# Altium PCB UDEMY_PCB.PcbDoc
Units mm, origin at the board's own origin, x right, y up, seen from the top; angles counter-clockwise.
Board outline 50 x 57.25 mm, 2 copper layers (Top Layer, Bottom Layer); 38 components, 25 nets, 187 pads, 130 vias.
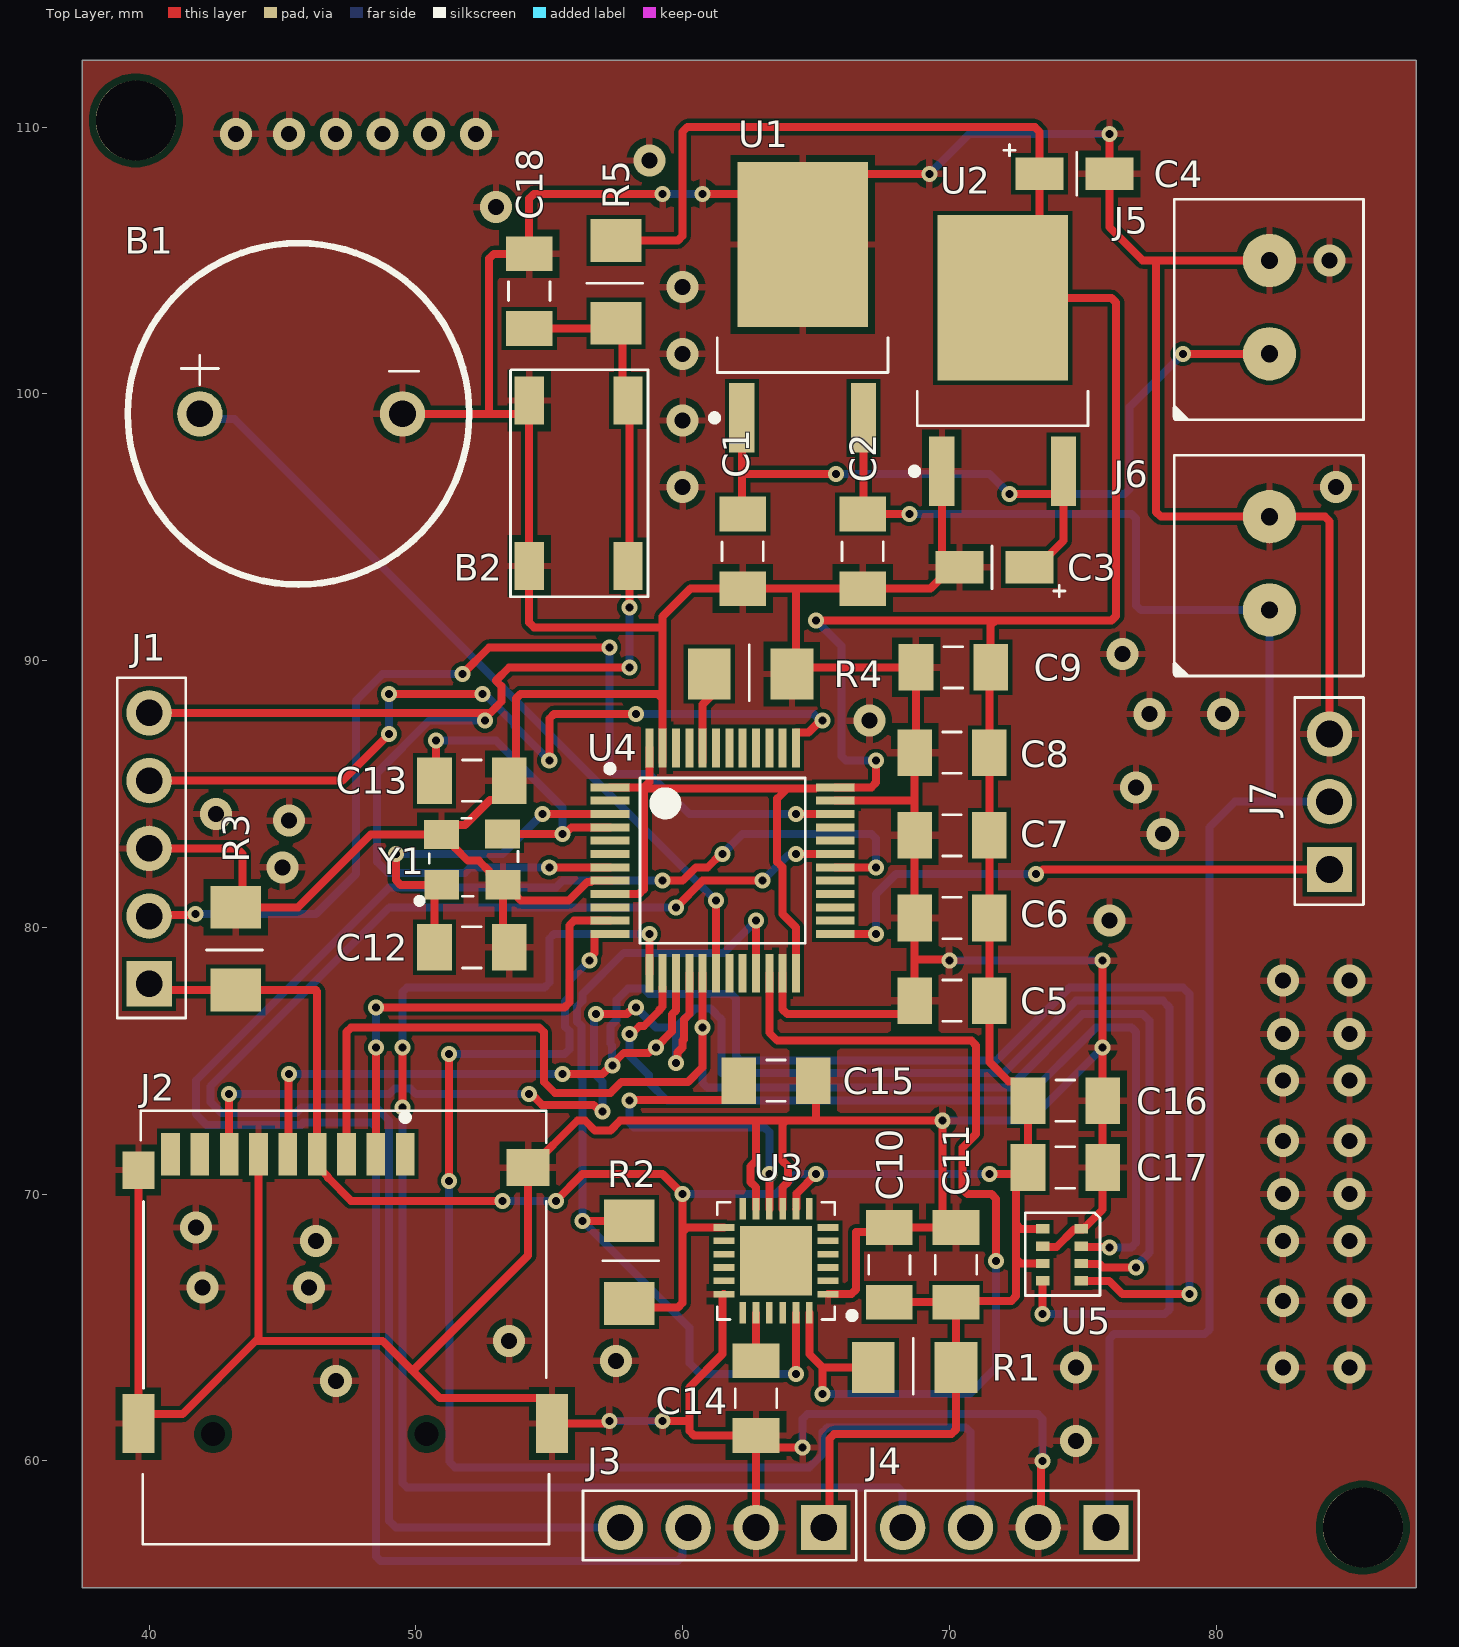
[diagram p0: Top Layer view]
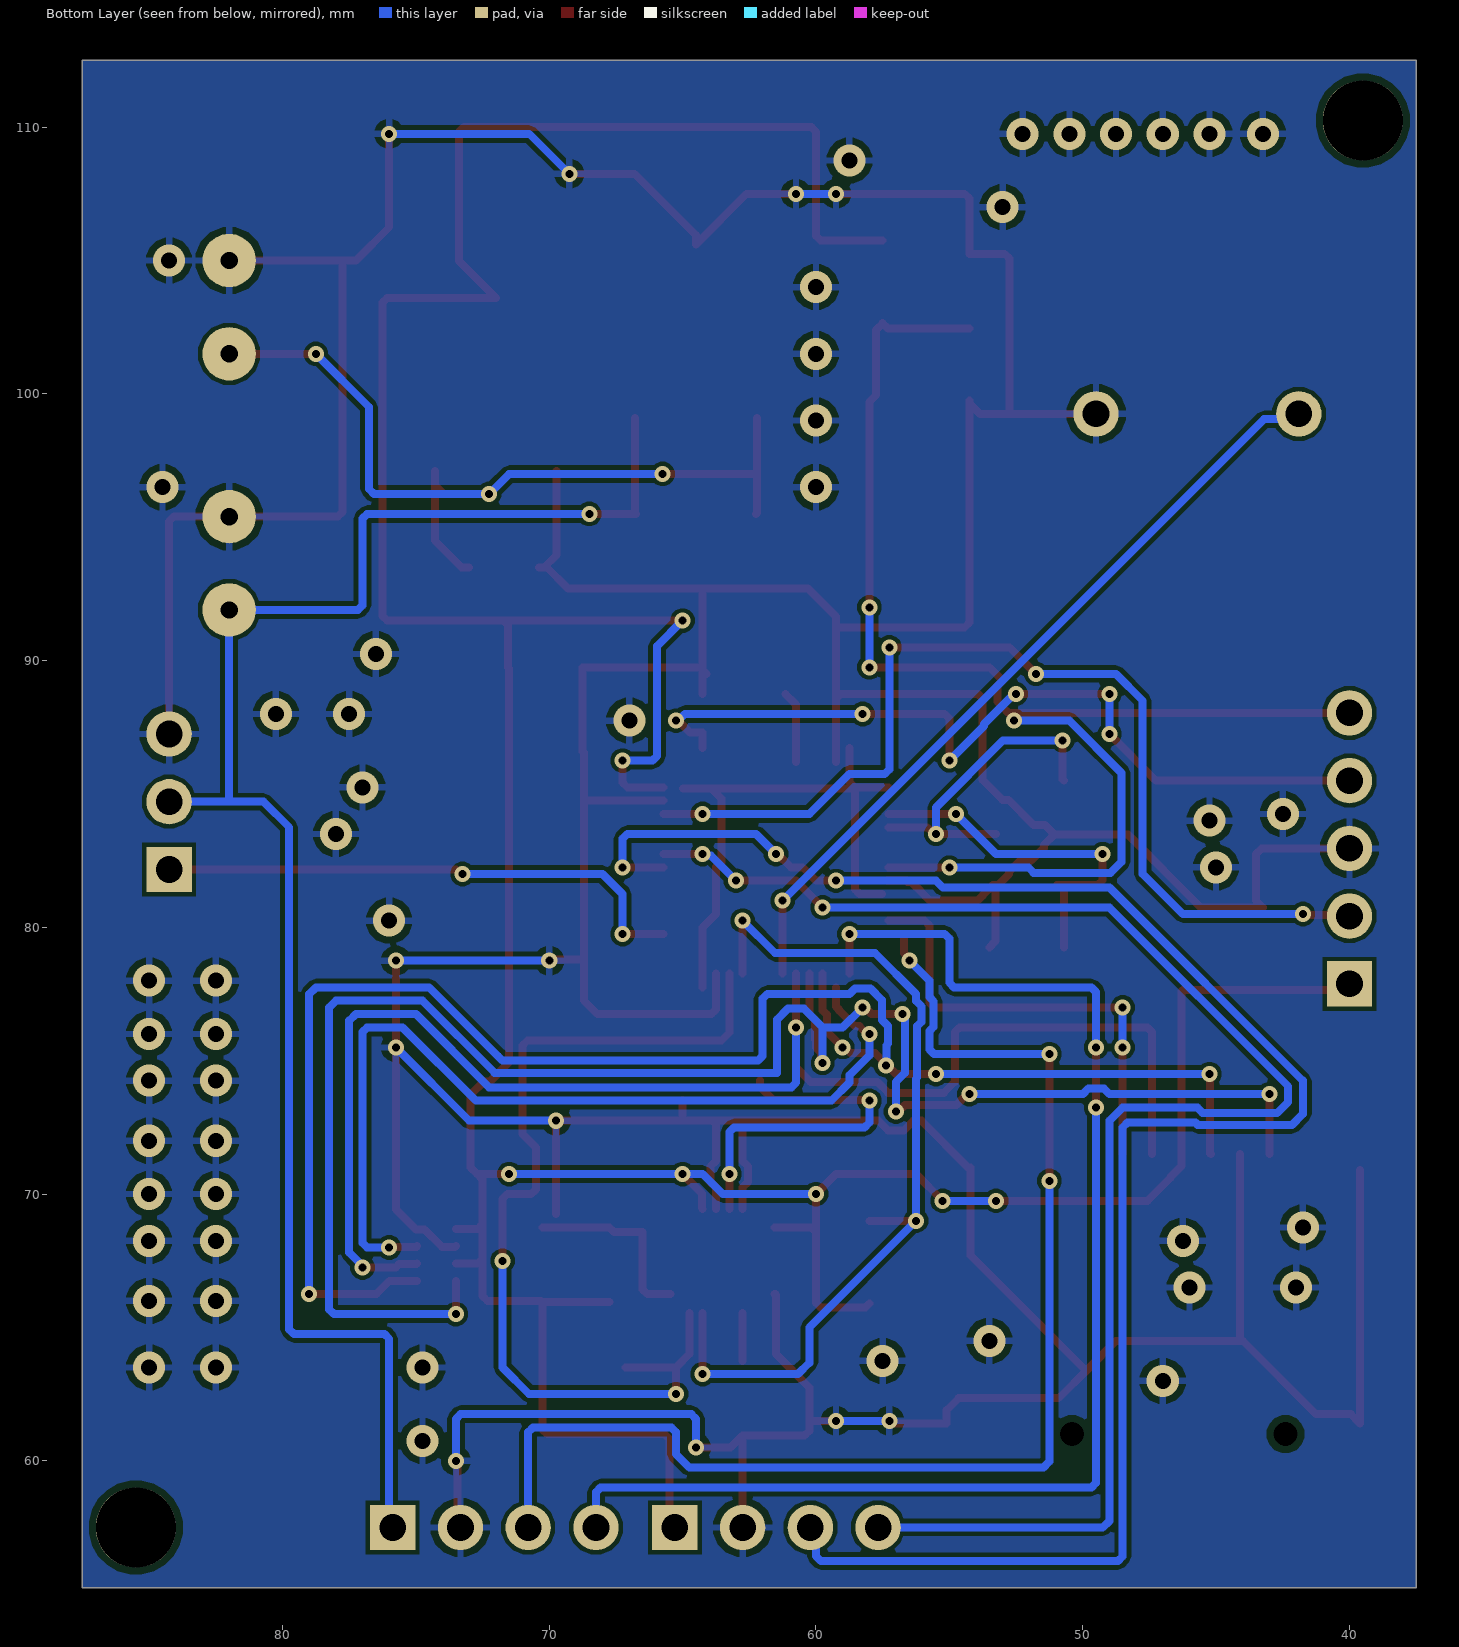
[diagram p1: Bottom Layer view, seen from below]
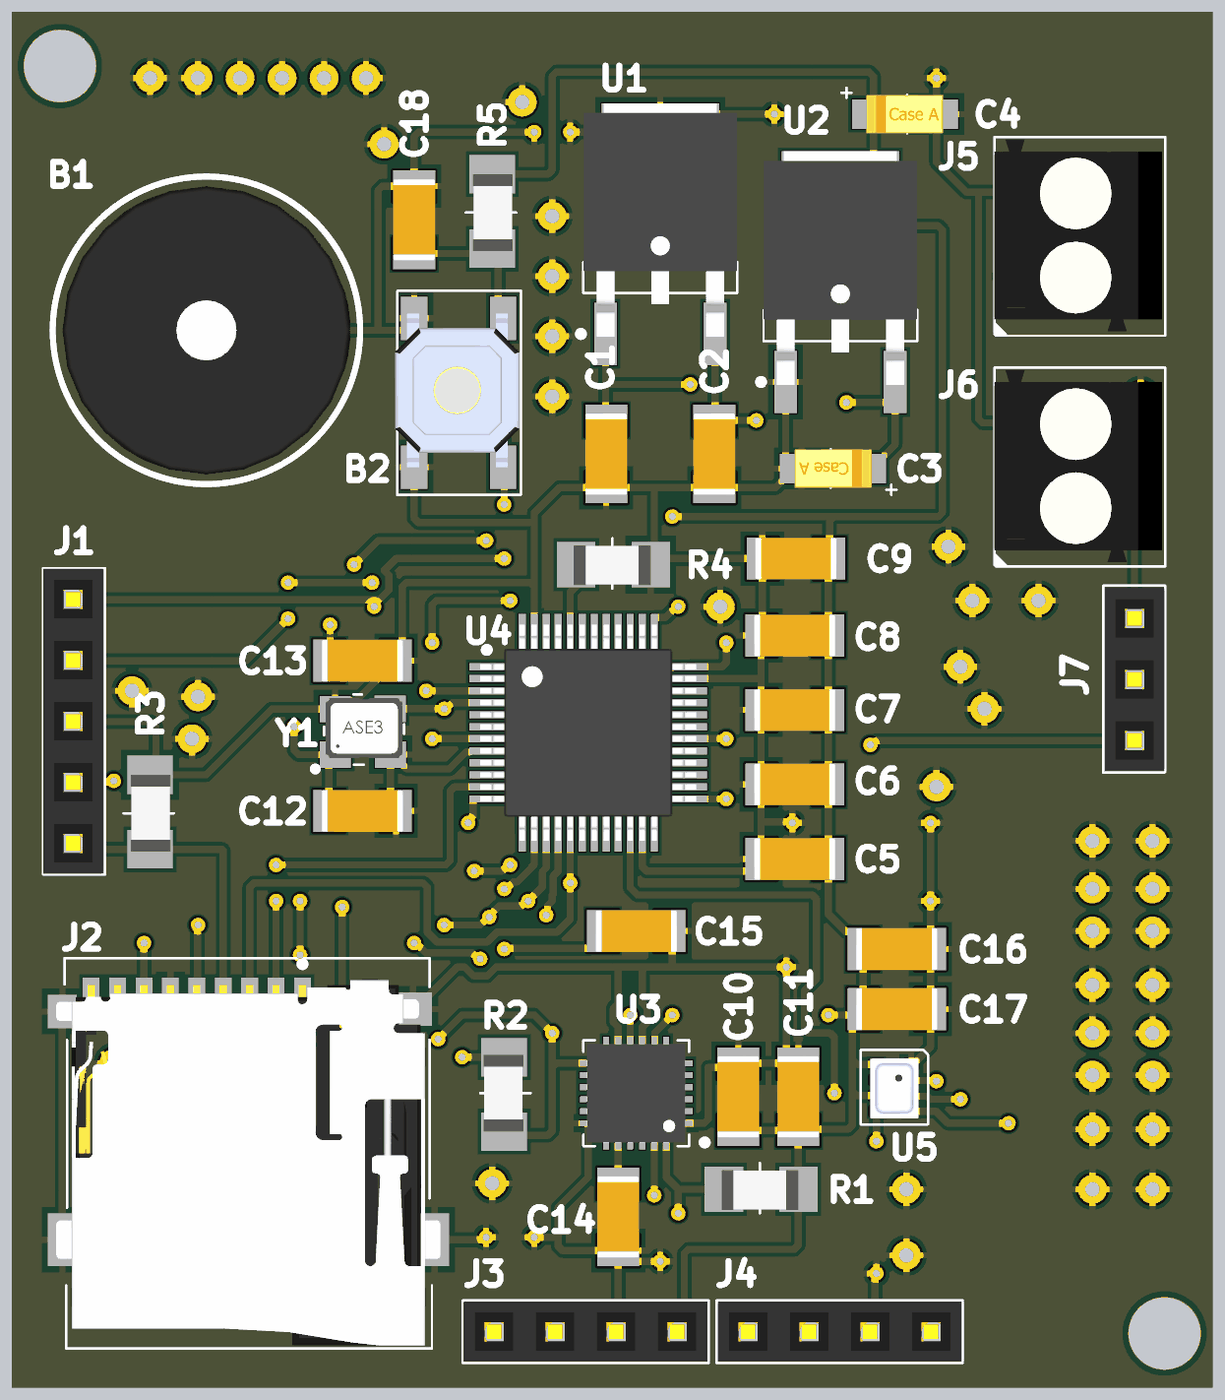
[diagram p2: 3D render of the assembled board from above, using the file's embedded part models]

## Layer stack, top to bottom
Top Solder: solder mask 0.0102, Solder Resist, Dk 3.5
Top Layer: signal copper 0.0356
Dielectric 1: dielectric 0.32, FR-4, Dk 4.8
Bottom Layer: signal copper 0.0356
Bottom Solder: solder mask 0.0102, Solder Resist, Dk 3.5

## Board outline
37.5,55.25 87.5,55.25 87.5,112.5 37.5,112.5

## Design rules (kind name [scope] priority, off if disabled: settings)
Clearance [All] p1: gap=0.254 ignorepadtopadclearanceinfootprint=FALSE except(0.152: Arc-Track Arc-SMDPad Arc-Poly Track-Track Track-SMDPad Track-Poly SMDPad-SMDPad SMDPad-Poly THPad-Poly Via-Poly Fill-Poly Poly-Poly)
HoleSize [All] p1: absolutevalues=TRUE maxlimit=3.1 minlimit=0.025 maxpercent=80.000 minpercent=20.000
MinimumSolderMaskSliver [All] p1: minsoldermaskwidth=0.096
PolygonConnect [All] p1: connectstyle=Relief reliefconductorwidth=0.254 reliefentries=4 polygonreliefangle="90 Angle" airgapwidth=0.254
RoutingVias [All] p1: holewidth=0.6 width=0.6 viastyle="Through Hole" minholewidth=0.3 minwidth=0.3 maxholewidth=0.9 maxwidth=1.27
SilkToSolderMaskClearance [IsPad] p1: minsilkscreentomaskgap=0.1 clearancetoexposedcopper=TRUE
SolderMaskExpansion [All] p1: expansion=0.102 istentingtop=FALSE
Width [All] p1: maxlimit=1 minlimit=0.254 preferedwidth=0.3 minimp=50.000000 maximp=50.000000 favimp=50.000000
27 further rules are at their usual default settings.

## Components (designator, comment, footprint, x,y, rotation, side; value= is the part's Value field where it differs from the comment)
B1 "BUZZER 5V" "BUZZER 5V" 41.9,99.25 r0 top
B2 "Push Button" "PUSB BUTTON-SMD" 57.95,99.75 r270 top
C1 "330nF Capasitor" "CAP 1206" 62.25,94.1 r90 top
C2 "0.1uF Capasitor" "CAP 1206" 66.75,94.1 r90 top
C3 "10 uF - Tantal" "C1206- TANTAL" 71.6,93.5 r180 top
C4 "10 uF - Tantal" "C1206- TANTAL" 74.78,108.25 r0 top
C5 "0.1uF" "CAP 1206" 70.1,77.25 r180 top
C6 "0.1uF" "CAP 1206" 70.1,80.35 r180 top
C7 "0.1uF" "CAP 1206" 70.1,83.45 r180 top
C8 "0.1uF" "CAP 1206" 70.1,86.55 r180 top
C9 "0.1uF" "CAP 1206" 70.15,89.75 r180 top
C10 "0.1uF" "CAP 1206" 67.75,67.35 r90 top
C11 "0.1uF" "CAP 1206" 70.25,67.35 r90 top
C12 "16 pF" "CAP 1206" 52.1,79.25 r0 top
C13 "16 pF" "CAP 1206" 52.1,85.5 r0 top
C14 "2.2 nF" "CAP 1206" 62.75,62.35 r270 top
C15 "0.1uF" "CAP 1206" 63.5,74.25 r0 top
C16 "0.1uF" "CAP 1206" 74.35,73.5 r0 top
C17 "0.1uF" "CAP 1206" 74.35,71 r0 top
C18 "0.1uF" "CAP 1206" 54.25,103.85 r90 top
J1 "Header 2.54 1x5" "Header 2.54 1x5" 40,77.88 r90 top
J2 "Micro SD Card Holder" "Micro SD Card Holder" 46.916,64.425 r0 top
J3 "Header 2.54 1x4" "Header 2.54 1x4" 64.79,56.775 r180 top
J4 "Header 2.54 1x4" "Header 2.54 1x4" 75.37,56.775 r180 top
J5 "Klemens 1x2 3.5mm" "Klemens 1x2 - 3.5mm" 81.95,103.1 r90 top
J6 "Klemens 1x2 3.5mm" "Klemens 1x2 - 3.5mm" 81.95,93.5 r90 top
J7 "Header 2.54 1x3" "Header 2.54 1x3" 84.225,82.17 r90 top
R1 "10K" "1206 RES" 67.15,63.5 r0 top
R2 "10K" "1206 RES" 58,69 r270 top
R3 "10K" "1206 RES" 43.25,77.65 r90 top
R4 "10K 1206" "1206 RES" 61,89.5 r0 top
R5 "10K 1206" "1206 RES" 57.5,102.65 r90 top
U1 "L7805" DPAK228P972X230-3N 64.5,103.25 r90 top
U2 "LD108633" DPAK228P972X230-3N 72,101.25 r90 top
U3 "MPU6050" QFN50P400X400X90_HS-25N 63.5,67.5 r180 top
U4 "STM32F101" LQFP48-STM 61.5,82.5 r0 top
U5 "BMP280" BMP280 74.95,68.7 r0 top
Y1 "8 MHz 12.5 pf Osc" "8 MHZ Osc." 51.947,82.083 r0 top

## Footprints (in the part's own frame and the unit in brackets; to place one, negate y for a bottom-side part, rotate by r counter-clockwise, add the part's x,y. Pads: shape width x height; smd on the part's side, far side on the other; paste and mask are expansions set on the pad)
"8 MHZ Osc." [mm]
  rect 1.3x1.1 smd mask+0.05: 1(-0.981,-0.49) 2(1.319,-0.49) 3(1.303,1.417) 4(-0.986,1.401)
  silkscreen extent -1.91,-1.19 1.88,2.01, body extent -1.38,-0.64 1.82,1.86, height 1.22
"1206 RES" [mm]
  rect 1.6x1.9 smd mask+0: 1(0,0) 1(0,0) 2(3.1,0)
  silkscreen extent 1.5,-1 1.5,1.1, body extent -0.1,-0.86 3.1,0.8, height 0.53
BMP280 [mm]
  rect 0.5x0.35 smd: 1(0,0) 2(0,-0.65) 3(0,-1.3) 4(0,-1.95) 5(-1.45,-1.95) 6(-1.45,-1.3) 7(-1.45,-0.65) 8(-1.45,0)
  silkscreen extent -2.1,-2.5 0.7,0.6, body extent -1.7,-2.25 0.3,0.25, height 1.05
"BUZZER 5V" [mm]
  round 1.7 hole 1 paste-2539.97 mask+0.102: 1(0,0) 2(7.6,0)
  silkscreen extent -2.7,-6.4 10.1,6.4, body extent -2.3,-6 9.7,6, height 9
"C1206- TANTAL" [mm]
  rect 1.8x1.23 smd mask+0.05: 1(-1.4,0) 1(-1.4,0) 2(1.22,0)
  silkscreen extent -2.74,-0.8 0,1.1, body extent -1.7,-0.8 1.5,0.8, height 1.62
"CAP 1206" [mm] "Chip Capacitor, 2-Leads, Body 3,20x1,55mm, IPC Medium Density"
  rect 1.3x1.75 smd: 1(-1.4,0) 2(1.4,0)
  silkscreen extent -0.35,-0.77 0.35,0.77, body extent -1.7,-0.87 1.7,0.87, height 0.65
DPAK228P972X230-3N [mm] "D-PAK, 3-Pads, Body 6,40x6,56mm (max), IPC Medium Density"
  rect 2.6x0.95 smd mask+0.05: 1(-4.15,2.28) 2(-4.15,-2.28)
  rect 6.2x4.9 smd mask+0.05: 3(2.35,0)
  silkscreen extent -4.27,-3.2 -1.15,3.43, body extent -4.27,-3.2 5.45,3.2, height 3.3
"Header 2.54 1x3" [mm]
  rect 1.7x1.7 hole 1 mask+0.05: 1(0,-0.025)
  round 1.7 hole 1 mask+0.05: 2(2.54,-0.025) 3(5.08,-0.025)
  silkscreen extent -1.33,-1.3 6.45,1.28, body extent -1.26,-1.27 6.36,1.23, height 9.1
"Header 2.54 1x4" [mm]
  rect 1.7x1.7 hole 1 mask+0.05: 1(-0.5,-0.725)
  round 1.7 hole 1 mask+0.05: 2(2.04,-0.725) 3(4.58,-0.725) 4(7.12,-0.725)
  silkscreen extent -1.73,-2.1 8.52,0.5, body extent -1.68,-2.05 8.48,0.45, height 9.1
"Header 2.54 1x5" [mm]
  rect 1.7x1.7 hole 1 mask+0.05: 1(0,0)
  round 1.7 hole 1 mask+0.05: 2(2.54,0) 3(5.08,0) 4(7.62,0) 5(10.16,0)
  silkscreen extent -1.28,-1.37 11.48,1.2, body extent -1.25,-1.3 11.45,1.2, height 9.1
"Klemens 1x2 - 3.5mm" [mm]
  round 2 hole 0.65: 1(-1.6,-0.05) 2(1.9,-0.05)
  silkscreen extent -4.11,-3.58 4.2,3.58, body extent -3.9,-3.45 4.09,3.55, height 8.9
LQFP48-STM [mm] "TSQFP, 48-Leads, Body 7,00x7,00mm, Pitch 0,50mm, IPC Medium Density"
  rect 1.45x0.3 smd mask+0.05: 1(-4.225,2.75) 2(-4.225,2.25) 3(-4.225,1.75) 4(-4.225,1.25) 5(-4.225,0.75) 6(-4.225,0.25) 7(-4.225,-0.25) 8(-4.225,-0.75) 9(-4.225,-1.25) 10(-4.225,-1.75) 11(-4.225,-2.25) 12(-4.225,-2.75) 25(4.225,-2.75) 26(4.225,-2.25) 27(4.225,-1.75) 28(4.225,-1.25) 29(4.225,-0.75) 30(4.225,-0.25) 31(4.225,0.25) 32(4.225,0.75) 33(4.225,1.25) 34(4.225,1.75) 35(4.225,2.25) 36(4.225,2.75)
  rect 0.3x1.45 smd mask+0.05: 13(-2.75,-4.225) 14(-2.25,-4.225) 15(-1.75,-4.225) 16(-1.25,-4.225) 17(-0.75,-4.225) 18(-0.25,-4.225) 19(0.25,-4.225) 20(0.75,-4.225) 21(1.25,-4.225) 22(1.75,-4.225) 23(2.25,-4.225) 24(2.75,-4.225) 37(2.75,4.225) 38(2.25,4.225) 39(1.75,4.225) 40(1.25,4.225) 41(0.75,4.225) 42(0.25,4.225) 43(-0.25,4.225) 44(-0.75,4.225) 45(-1.25,4.225) 46(-1.75,4.225) 47(-2.25,4.225) 48(-2.75,4.225)
  silkscreen extent -4.35,-3.1 3.1,3.57, body extent -4.5,-4.5 4.5,4.5, height 1.6
"Micro SD Card Holder" [mm]
  rect 0.7x1.6 smd paste+0 mask+0: 1(2.684,7.075) 2(1.584,7.075) 3(0.484,7.075) 4(-0.616,7.075) 5(-1.716,7.075) 6(-2.816,7.075) 7(-3.916,7.075) 8(-5.016,7.075) Cd(-6.116,7.075)
  rect 1.2x1.4 smd paste+0 mask+0: 10(-7.316,6.475)
  rect 1.6x1.4 smd paste+0 mask+0: 11(7.284,6.575)
  rect 1.2x2.2 smd paste+0 mask+0: 12(-7.316,-3.025) 13(8.184,-3.025)
  round 0 hole 0.9 unplated paste-2539.97 mask+0: ""(-4.516,-3.425) ""(3.484,-3.425)
  silkscreen extent -7.22,-7.55 8.08,8.7, body extent -7.57,-7.42 8.43,7.83, height 1.85
"PUSB BUTTON-SMD" [mm]
  rect 1.8x1.1 smd mask+0.05: 1(0,0) 2(6.2,0) 3(0,-3.7) 4(6.2,-3.7)
  silkscreen extent -1.15,-4.4 7.35,0.75, body extent -0.2,-4.5 6.2,0.7, height 1.5
QFN50P400X400X90_HS-25N [mm] "QFN, 24-Leads, Body 4,00x4,00mm, Pitch 0,50mm, Thermal Pad 2,70x2,60mm, IPC Medium Density"
  rect 0.8x0.25 smd mask+0.05: 1(-1.95,1.25) 2(-1.95,0.75) 3(-1.95,0.25) 4(-1.95,-0.25) 5(-1.95,-0.75) 6(-1.95,-1.25) 13(1.95,-1.25) 14(1.95,-0.75) 15(1.95,-0.25) 16(1.95,0.25) 17(1.95,0.75) 18(1.95,1.25)
  rect 0.25x0.8 smd mask+0.05: 7(-1.25,-1.95) 8(-0.75,-1.95) 9(-0.25,-1.95) 10(0.25,-1.95) 11(0.75,-1.95) 12(1.25,-1.95) 19(1.25,1.95) 20(0.75,1.95) 21(0.25,1.95) 22(-0.25,1.95) 23(-0.75,1.95) 24(-1.25,1.95)
  rect 2.7x2.6 smd mask+0.05: 25(0,0)
  silkscreen extent -2.98,-2.2 2.2,2.2, body extent -2.07,-2.07 2.07,2.07, height 0.9

## Part data
B2: "Smd Push Button", Satın Alma Linki=https://urun.n11.com/diger/mini-pushbutton-switch-smd-P227461537?gclid=Cj0KCQjwkoDmBRCcARIsAG3xzl8Y_-jeD7HocNM6lvuZ_rVp83568XPGtNzlPwXWLph8oCRqo0yh87UaApZYEALw_wcB&gclsrc=aw.ds
C5 C6 C7 C8 C9 C10 C11 C15 C16 C17 C18: library part "0.1uF Capasitor", "0.1uF Capasitor"
C14: library part "2.2 nF c1206", "2.2 nF c1206"
R1 R2 R3: library part "10K 1206", "10K 1206"
U1: "L7805 5V REGULATOR DPAK"
U2: "LD108633 3.3V REGULATOR DPAK"
U3: "MPU6050 GYRO"
U4: "STM32F101 48 pinli mikrodenetleyicisi"
U5: "BMP280 SENSOR"

## Free pads (board coordinates)
  round 3 hole 3 mask+0: ""(39.5,110.25) ""(85.5,57.5)

## Via types
v1: diameter 0.6, hole 0.3, Top Layer to Bottom Layer, 81 vias
v2: diameter 1.2, hole 0.6, Top Layer to Bottom Layer, 49 vias

## Nets (pads, with @x,y where several pads share a name; then routed paths per layer and width w, separated by ;. In a path a pad name is that pad's centre, name@x,y a point inside that pad or via, vN(x,y) a via of type N, cw(c..) or ccw(c..) an arc to the next point about the centre after c; other vN are vias at no path point)
3.3V: C4.1 C5.1 C6.1 C7.1 C8.1 C9.1 C10.1 C11.1 C16.1 C17.1 J1.1 J2.4 J3.1 R1.2 R2.2 R3.1 R5.2 U2.3 U3.8 U3.13 U4.1 U4.9 U4.24 U4.36 U4.48 U5.6 U5.8 | length 182.4
  Top Layer w0.3: J1.1 40.23,77.65 43.25,77.65 46.25,77.65 46.3,77.6 J2.4 46.3,71.05 46.713,70.637 46.713,70.61 47.573,69.75 v1(53.25,69.75) ; v1(55.25,69.75) 56.25,70.75 59.25,70.75 v1(60,70) 60,68.574 ; U4.1 58.546,85.25 ; R5.2 59.824,105.75 60,105.926 60,109.824 60.176,110 73.204,110 73.38,109.824 73.38,108.25 73.38,104.98 U2.3 76.074,103.6 76.25,103.424 76.25,91.676 76.074,91.5 71.726,91.5 ; U4.9@57.522,81.25 58.37,81.25 58.546,81.426 58.546,85.25 ; R2.2 58.15,65.75 59.824,65.75 60,65.926 60,68.574 ; U4.48 58.75,85.454 58.546,85.25 ; U3.13 60.176,68.75 60,68.574 ; U3.8 64.275,69.475 64.275,70.025 v1(65,70.75) ; U4.24@64.25,77.75 64.25,80 63.75,80.5 63.75,82.254 63.546,82.458 63.546,84.822 63.926,85.202 ; 64.977,85.202 63.926,85.202 ; v1(65,91.5) 71.726,91.5 ; J3.1 65.5,57.71 65.5,60.824 65.676,61 70.074,61 70.25,61.176 R1.2 C11.1 ; U4.36 67.074,85.25 67.25,85.426 v1(67.25,86.25) ; C10.1 C11.1 ; v1(71.5,70.75) C17.1@72.7,70.75 ; U5.6 72.676,67.4 72.5,67.576 ; U5.8 72.676,68.7 72.5,68.876 ; 58.546,85.25 58.594,85.202 63.926,85.202 ; C11.1 70.3,66 72.324,66 72.5,66.176 72.5,67.576 ; 71.726,91.5 71.55,91.324 C9.1 71.5,89.7 C8.1 C7.1 C6.1 C5.1 71.5,74.95 72.225,74.225 72.45,74.225 72.95,73.725 C17.1 C17.1@72.7,70.75 ; 72.5,67.576 72.5,68.876 ; 72.5,68.876 72.5,70.55 C17.1@72.7,70.75
  Bottom Layer w0.3: v1(53.25,69.75) v1(55.25,69.75) ; v1(60,70) 63.496,70 64.246,70.75 v1(65,70.75) v1(71.5,70.75) ; v1(65,91.5) 65.954,90.546 65.954,86.426 66.13,86.25 v1(67.25,86.25)
5V: C2.2 J4.1 J6.1 J7.2 U1.2 | length 64.2
  Top Layer w0.3: U1.2 66.78,95.53 C2.2 v1(68.5,95.5)
  Bottom Layer w0.3: v1(68.5,95.5) 76.824,95.5 77,95.324 77,92.076 77.176,91.9 J6.1 82,84.71 ; J4.1 76,57.63 76,64.574 76.176,64.75 79.574,64.75 79.75,64.926 79.75,83.75 80.71,84.71 82,84.71 ; J7.2 82,84.71
GND: B1.2 B2.3 B2.4 C1.1 C2.1 C3.2 C4.2 C5.2 C6.2 C7.2 C8.2 C9.2 C10.2 C11.2 C12.2 C13.2 C14.2 C15.2 C16.2 C17.2 C18.2 J1.3 J2.6 J2.10 J2.11 J2.12 J2.13 J3.2 J4.2 J5.2 J6.2 J7.3 R3.2 R4.2 U1.3 U2.1 U3.1 U3.9 U3.11 U3.18 U4.8 U4.23 U4.35 U4.47 U5.1 U5.7 Y1.2 Y1.4 | length 314.2
  Top Layer w0.3: J2.10 J2.12 39.95,61.75 41.25,61.75 44,64.5 ; J1.3 43.29,82.96 43.5,82.75 43.5,81 R3.2 45.574,80.75 48.308,83.484 Y1.4 Y1.4@51.061,83.484 ; J2.6 44.1,64.6 44,64.5 ; B1.2 52.75,99.25 ; C12.2 53.265,79.485 Y1.2 ; B2.3 B2.3@54.25,99.65 ; v1(57.25,61.5) 57.169,61.5 57.069,61.4 J2.13 55.1,61.9 54.65,62.35 50.9,62.35 49.825,63.425 ; U4.8@57.327,81.75 56.612,81.75 56.564,81.702 56.425,81.702 55.723,81 53.941,81 53.765,81.176 53.765,81.193 53.365,81.593 Y1.2 ; v1(59.25,61.5) 60.25,61.5 ; U4.47@59.25,86.2 59.25,88.574 ; v1(59.25,107.5) 54.426,107.5 54.25,107.324 C18.2 52.926,105.25 52.75,105.074 52.75,99.25 ; v1(60.75,107.5) 62.6,107.5 U1.3 64.5,105.95 66.8,108.25 v1(69.25,108.25) ; U3.18 61.525,66.25 61.5,66.225 61.5,64 60.25,62.75 60.25,61.5 ; J3.2 C14.2 ; U3.11 62.75,70.254 62.546,70.458 62.546,71.042 62.75,71.246 62.75,72.75 ; U3.9 63.75,70.254 63.954,70.458 63.954,71.042 63.75,71.246 63.75,72.625 63.875,72.75 ; U4.23 63.75,76.926 63.926,76.75 68.2,76.75 C5.2 68.7,78.8 ; R4.2 64.35,89.75 C9.2 68.75,86.6 C8.2 68.7,84.75 ; R4.2@64.25,88.75 64.25,92.5 64.25,92.7 ; v1(64.5,60.5) 63.2,60.5 C14.2 ; C15.2@65,73.5 65,72.75 ; U3.1 66.324,66.25 66.5,66.426 66.5,68.574 67.574,68.574 C10.2 C11.2 ; U4.35 68.7,84.75 ; U2.1 69.72,93.965 C3.2@70.185,93.5 ; C11.2@69.75,69.25 v1(69.75,72.75) 65,72.75 ; v1(70,78.75) 69.95,78.8 68.7,78.8 ; C3.2 C3.2@70.185,93.5 ; J4.2 73.443,57.613 73.443,59.943 v1(73.5,60) ; U5.7 73.525,68.025 74.025,68.025 74.675,68.675 75,68.675 75.75,69.425 C17.2 C16.2 v1(75.75,78.75) ; v1(76,109.75) C4.2 76,106.25 77.25,105 77.75,105 ; J5.2 77.75,105 ; J7.3 84.25,95.224 84.074,95.4 J6.2 77.926,95.4 77.75,95.576 77.75,105 ; 44,64.5 48.75,64.5 49.825,63.425 ; 49.825,63.425 49.925,63.425 54.2,67.7 J2.11 54.3,71 56.05,72.75 56.346,72.75 56.708,72.388 57.292,72.388 57.654,72.75 62.75,72.75 ; Y1.4@51.061,83.484 51.418,83.841 51.841,83.841 52.775,84.775 53,84.775 53.75,85.525 53.75,88.574 53.926,88.75 59.074,88.75 59.25,88.574 ; Y1.4@51.061,83.484 51.461,83.084 51.461,82.984 51.945,82.5 52.358,82.5 52.765,82.093 52.765,81.993 53.165,81.593 Y1.2 ; 52.75,99.25 53.85,99.25 B2.3@54.25,99.65 ; B2.3@54.25,99.65 B2.4 54.25,91.426 54.426,91.25 59.25,91.25 ; 59.25,88.574 59.25,91.25 ; 59.25,91.25 59.25,91.65 60.3,92.7 64.25,92.7 ; 60.25,61.5 60.25,61.126 60.426,60.95 C14.2 ; 62.75,72.75 63.75,72.75 63.875,72.75 ; 63.875,72.75 65,72.75 ; 64.25,92.7 C2.1 69.295,92.7 70.095,93.5 C3.2@70.185,93.5 ; 68.7,78.8 C6.2 C7.2 68.7,84.75
  Bottom Layer w0.3: v1(57.25,61.5) v1(59.25,61.5) ; v1(59.25,107.5) v1(60.75,107.5) ; v1(64.5,60.5) 64.5,61.574 64.676,61.75 73.324,61.75 73.5,61.574 v1(73.5,60) ; v1(69.25,108.25) 70.75,109.75 v1(76,109.75) ; v1(69.75,72.75) 73,72.75 v1(75.75,75.5) ; v1(70,78.75) v1(75.75,78.75)
  other v2: 74.75,60.75 47,63 74.75,63.5 82.5,63.5 85,63.5 57.5,63.75 53.5,64.5 82.5,66 85,66 42,66.5 46,66.5 46.25,68.25 82.5,68.25 85,68.25 41.75,68.75 82.5,70 85,70 82.5,72 85,72 82.5,74.25 85,74.25 82.5,76 85,76 82.5,78 85,78 76,80.25 45,82.25 78,83.5 45.25,84 42.5,84.25 77,85.25 67,87.75 77.5,88 80.25,88 76.5,90.25 60,96.5 84.5,96.5 60,99 60,101.5 60,104 84.25,105 53,107 58.75,108.75 43.25,109.75 45.25,109.75 47,109.75 48.75,109.75 50.5,109.75 52.25,109.75
NetB1_1: B1.1 U4.18 | length 29.6
  Top Layer w0.3: U4.18 v1(61.25,81)
  Bottom Layer w0.3: B1.1 42.1,99.05 43.2,99.05 v1(61.25,81)
NetC12_1: C12.1 U4.3 Y1.1 | length 13.5
  Top Layer w0.3: v1(49.25,82.75) 49.25,81.769 49.426,81.593 Y1.1 ; C12.1 Y1.1@50.7,81.327 ; v1(54.75,84.25) U4.3
  Bottom Layer w0.3: v1(49.25,82.75) 53.25,82.75 v1(54.75,84.25)
NetC13_1: C13.1 U4.4 Y1.3 | length 12.4
  Top Layer w0.3: C13.1 50.75,85.55 v1(50.75,87) ; Y1.3 v1(55.5,83.5) 55.581,83.5 55.831,83.75 U4.4
  Bottom Layer w0.3: v1(50.75,87) 52.996,87 55.5,84.496 v1(55.5,83.5)
NetC14_1: C14.1 U3.20 | length 1.8
  Top Layer w0.3: C14.1 U3.20
NetC15_1: C15.1 U3.10 | length 13.6
  Top Layer w0.3: v1(58,73.5) 58.025,73.525 61.6,73.525 62.1,74.025 C15.1 ; U3.10 v1(63.25,70.75)
  Bottom Layer w0.3: v1(58,73.5) 58,72.676 58.176,72.5 63.074,72.5 63.25,72.324 v1(63.25,70.75)
NetJ1_2: J1.2 U4.34 | length 39
  Top Layer w0.3: J1.2 40.04,80.46 41.706,80.46 v1(41.746,80.5) ; v1(51.75,89.5) 52.75,90.5 v1(57.25,90.5) ; v1(64.25,84.25) U4.34
  Bottom Layer w0.3: v1(41.746,80.5) 46.25,80.5 47.75,82 47.75,88.496 48.754,89.5 v1(51.75,89.5) ; v1(57.25,90.5) 57.25,85.926 57.426,85.75 58.75,85.75 60.25,84.25 v1(64.25,84.25)
NetJ1_4: J1.4 U4.37 | length 32.1
  Top Layer w0.3: J1.4 47.25,85.5 v1(49,87.25) ; v1(49,88.75) v1(52.5,88.75) ; v1(55,86.25) 55,87.824 55.176,88 v1(58.25,88) ; U4.37 64.25,87.3 64.719,87.3 65.169,87.75 v1(65.25,87.75)
  Bottom Layer w0.3: v1(49,87.25) v1(49,88.75) ; v1(52.5,88.75) 52.581,88.75 53.704,87.627 53.704,87.546 v1(55,86.25) ; v1(58.25,88) 64.919,88 65.169,87.75 v1(65.25,87.75)
NetJ2_2: J2.2 U4.11 | length 17.3
  Top Layer w0.3: J2.2 v1(48.5,75.5) ; v1(48.5,77) 55.574,77 55.75,77.176 55.75,80.074 55.926,80.25 U4.11
  Bottom Layer w0.3: v1(48.5,75.5) v1(48.5,77)
NetJ2_3: J2.3 U4.17 U5.3 | length 55.7
  Top Layer w0.3: J2.3 47.4,76.074 47.576,76.25 54.62,76.25 54.796,76.074 54.796,74.208 55.208,73.796 57.292,73.796 57.7,74.204 60.2,74.204 60.75,74.754 v1(60.75,76.25) 60.75,77.044 U4.17 ; U5.3 74.975,67.375 75.629,67.375 75.754,67.25 v1(77,67.25)
  Bottom Layer w0.3: v1(60.75,76.25) 60.75,74.176 60.926,74 72.25,74 75,76.75 77.25,76.75 77.5,76.5 77.5,67.811 77,67.311 v1(77,67.25)
NetJ2_5: J2.5 U4.15 U5.4 | length 63.6
  Top Layer w0.3: J2.5 45.225,71.525 45.225,74.475 v1(45.25,74.5) ; v1(55.5,74.5) 57,74.5 57.329,74.829 v1(57.375,74.829) ; v1@57.352,74.852 57.796,75.296 58.715,75.296 58.919,75.5 v1(59,75.5) 59.594,76.094 59.594,76.729 59.75,76.885 U4.15 ; U5.4 75.984,66.75 76.484,66.25 v1(79,66.25)
  Bottom Layer w0.3: v1(45.25,74.5) v1(55.5,74.5) ; v1(57.375,74.829) 57.358,74.846 57.358,75.579 57.296,75.64 57.296,76.3 57.525,76.53 57.525,77.271 57.958,77.704 58.542,77.704 58.746,77.5 61.824,77.5 62,77.324 62,75.176 62.176,75 71.755,75 71.93,75.176 71.93,75.18 74.5,77.75 78.75,77.75 79,77.5 v1(79,66.25)
NetJ2_7: J2.7 U4.16 U5.5 | length 68.4
  Top Layer w0.3: J2.7 v1(43,73.75) ; v1(54.25,73.75) 54.331,73.75 54.737,73.344 56.667,73.344 56.919,73.092 v1(57,73.092) ; v1(56.75,76.75) 57.919,76.75 58.169,77 v1(58.25,77) ; v1(59.75,74.908) 59.807,74.965 59.807,75.307 60,75.5 60,75.75 60.046,75.796 60.046,76.542 60.25,76.746 U4.16 ; v1(73.5,65.5) U5.5
  Bottom Layer w0.3: v1(43,73.75) 49.004,73.75 49.208,73.954 49.792,73.954 49.996,73.75 v1(54.25,73.75) ; v1(56.75,76.75) 56.75,76.669 56.671,76.59 56.671,74.537 57,74.208 v1(57,73.092) ; v1(58.25,77) 59.004,76.246 59.75,76.246 ; v1(59.75,74.908) 59.75,76.246 ; v1(73.5,65.5) 78.074,65.5 78.25,65.676 78.25,77 78,77.25 74.75,77.25 72.046,74.546 61.454,74.546 61.454,76.542 61.25,76.746 61.25,76.75 61.046,76.954 60.458,76.954 59.75,76.246
NetJ3_3: J3.3 U4.30 | length 69.2
  Top Layer w0.3: v1(59.25,81.75) 60,81.75 60.5,82.25 60.939,82.25 61.439,82.75 v1(61.5,82.75) ; U4.30 v1(67.25,82.25)
  Bottom Layer w0.3: v1(59.25,81.75) 55.496,81.75 55.246,81.5 49,81.5 41.75,74.25 41.75,73 42.156,72.594 45.689,72.594 45.776,72.68 48.324,72.68 48.5,72.505 48.5,56.422 48.676,56.246 59.82,56.246 60,56.426 60,57.29 J3.3 ; v1(61.5,82.75) 62.25,83.5 67.074,83.5 67.25,83.324 v1(67.25,82.25)
NetJ3_4: J3.4 U4.31 | length 58.6
  Top Layer w0.3: v1(59.75,80.75) 60.75,81.75 v1(63,81.75) ; v1(64.25,82.75) U4.31
  Bottom Layer w0.3: J3.4 49.25,57.5 49,57.75 49,72.75 48.5,73.25 45.706,73.25 45.502,73.046 42.708,73.046 42.296,73.458 42.296,74.042 49.004,80.75 v1(59.75,80.75) ; v1(63,81.75) 63.943,82.693 64.193,82.693 v1(64.25,82.75)
NetJ4_3: J4.3 U4.12 | length 49.7
  Top Layer w0.3: v1(51.25,70.5) v1(51.25,75.25) ; v1(56.5,78.75) 56.5,78.831 56.7,79.031 56.7,79.75 U4.12
  Bottom Layer w0.3: v1(51.25,70.5) 51.25,65.185 51.254,65.181 51.254,59.972 51.476,59.75 64.75,59.75 65.25,60.25 65.25,61.074 65.426,61.25 70.614,61.25 70.79,61.074 J4.3 ; v1(51.25,75.25) 55.574,75.25 55.75,75.426 55.75,76.115 55.594,76.271 55.594,77.229 55.75,77.385 55.75,78 v1(56.5,78.75)
NetJ4_4: J4.4 U4.13 | length 51.2
  Top Layer w0.3: v1(49.5,73.25) v1(49.5,75.5) ; U4.13 v1(58.75,79.75)
  Bottom Layer w0.3: v1(49.5,73.25) 49.5,59.176 49.676,59 68.074,59 68.25,58.824 J4.4 ; v1(49.5,75.5) 49.5,77.574 49.676,77.75 54.824,77.75 55,77.926 55,79.574 55.176,79.75 v1(58.75,79.75)
NetJ7_1: J7.1 U4.25 | length 20.4
  Top Layer w0.3: U4.25 v1(67.25,79.75) ; v1(73.25,82) 73.331,82 73.501,82.17 J7.1
  Bottom Layer w0.3: v1(67.25,79.75) 67.25,81.25 68,82 v1(73.25,82)
NetR1_1: R1.1 U3.24 U4.22 | length 35.6
  Top Layer w0.3: U4.22 63.25,76.05 63.55,75.75 70.824,75.75 71,75.574 71,72.25 70.5,71.75 70.5,70.176 70.676,70 71.574,70 71.75,69.824 v1(71.75,67.5) ; U3.24 64.75,64 65.25,63.5 ; v1(65.25,62.5) 65.25,63.5 ; R1.1@67.15,63.5 65.25,63.5
  Bottom Layer w0.3: v1(65.25,62.5) 70.75,62.5 71.75,63.5 v1(71.75,67.5)
NetR2_1: R2.1 U3.23 U4.21 | length 33.5
  Top Layer w0.3: v1(56.25,69) R2.1@58,69 ; U4.21 v1(62.75,80.25) ; v1(64.25,63.25) U3.23
  Bottom Layer w0.3: v1(62.75,80.25) 61.546,79.046 57.796,79.046 56.25,77.5 56.25,77.246 56.046,77.042 56.046,76.458 56.204,76.3 56.204,74.365 56.25,74.319 v1(56.25,69) 60.25,65 60.25,63.676 60.676,63.25 v1(64.25,63.25)
NetR4_1: R4.1 U4.44 | length 2.7
  Top Layer w0.3: U4.44@60.75,86.2 60.75,88.35 R4.1@61.15,88.75
NetU4_14: U4.14 U5.2 | length 34.3
  Top Layer w0.3: v1(58,76) 58.081,76 58.377,76.296 58.546,76.296 59.142,76.892 59.142,76.916 59.25,77.024 U4.14@59.25,77.75 ; U5.2 74.975,68.025 75.975,68.025 v1(76,68)
  Bottom Layer w0.3: v1(58,76) 58,75.2 58.742,74.458 58.742,74.184 59.426,73.5 72.75,73.5 75.5,76.25 76.824,76.25 77,76.074 77,68.176 76.824,68 v1(76,68)
NRST: B2.1 B2.2 C18.1 J1.5 R5.1 U4.7 | length 53.4
  Top Layer w0.3: J1.5 v1@52.586,88.04 ; v1(52.586,87.75) v1@52.586,88.04 ; C18.1 57.3,102.45 57.5,102.65 57.75,102.4 57.75,99.95 58,99.7 v1(58,92) ; v1(55,82.25) U4.7 ; v1(58,89.75) 53.5,89.75 53,89.25 53,89.246 53.204,89.042 53.204,88.458 53,88.254 52.786,88.04 v1@52.586,88.04
  Bottom Layer w0.3: v1(52.586,87.75) 50.504,87.75 48.546,85.792 48.546,82.458 48.958,82.046 51.837,82.046 52.041,82.25 v1(55,82.25) ; v1(58,89.75) v1(58,92)
VCC: C1.2 C3.1 J5.1 U1.1 U2.2 | length 34.1
  Top Layer w0.3: U1.1 62.22,97 ; C1.2 62.22,95.53 62.22,97 ; v1(65.75,97) 62.22,97 ; v1(72.25,96.25) 73.955,96.25 U2.2@74.28,96.575 ; C3.1@73,93.5 73.285,93.5 74.28,94.495 U2.2@74.28,96.575 ; U2.2 U2.2@74.28,96.575 ; v1(78.75,101.5) J5.1
  Bottom Layer w0.3: v1(65.75,97) 71.5,97 v1(72.25,96.25) 76.574,96.25 76.75,96.426 76.75,99.5 v1(78.75,101.5)
pads on no net: J2. J2.1 J2.8 J2.Cd U3.2 U3.3 U3.4 U3.5 U3.6 U3.7 U3.12 U3.14 U3.15 U3.16 U3.17 U3.19 U3.21 U3.22 U3.25 U4.2 U4.5 U4.6 U4.10 U4.19 U4.20 U4.26 U4.27 U4.28 U4.29 U4.32 U4.33 U4.38 U4.39 U4.40 U4.41 U4.42 U4.43 U4.45 U4.46

## Polygon pours and split planes (outlines as drawn)
GND on Bottom Layer "GND_L02_P001" (solid, pour order 1): 37.5,112.5 87.5,112.5 87.5,55.25 37.5,55.25
GND on Top Layer "GND_L01_P000" (solid, pour order 0): 37.5,112.5 87.5,112.5 87.5,55.25 37.5,55.25

## Silkscreen, mask and mechanical layers (free items; w line width, h text height)
Mechanical 1:
  the board outline again, w0.1